# Altium PCB PCB.PcbDoc
Units mil, origin at the board's own origin, x right, y up, seen from the top; angles counter-clockwise.
Board outline 3937.01 x 3937.01 mil, 2 copper layers (Top Layer, Bottom Layer); 30 components, 19 nets, 76 pads, 0 vias.
Unrouted connection lines stored in the file: 14.
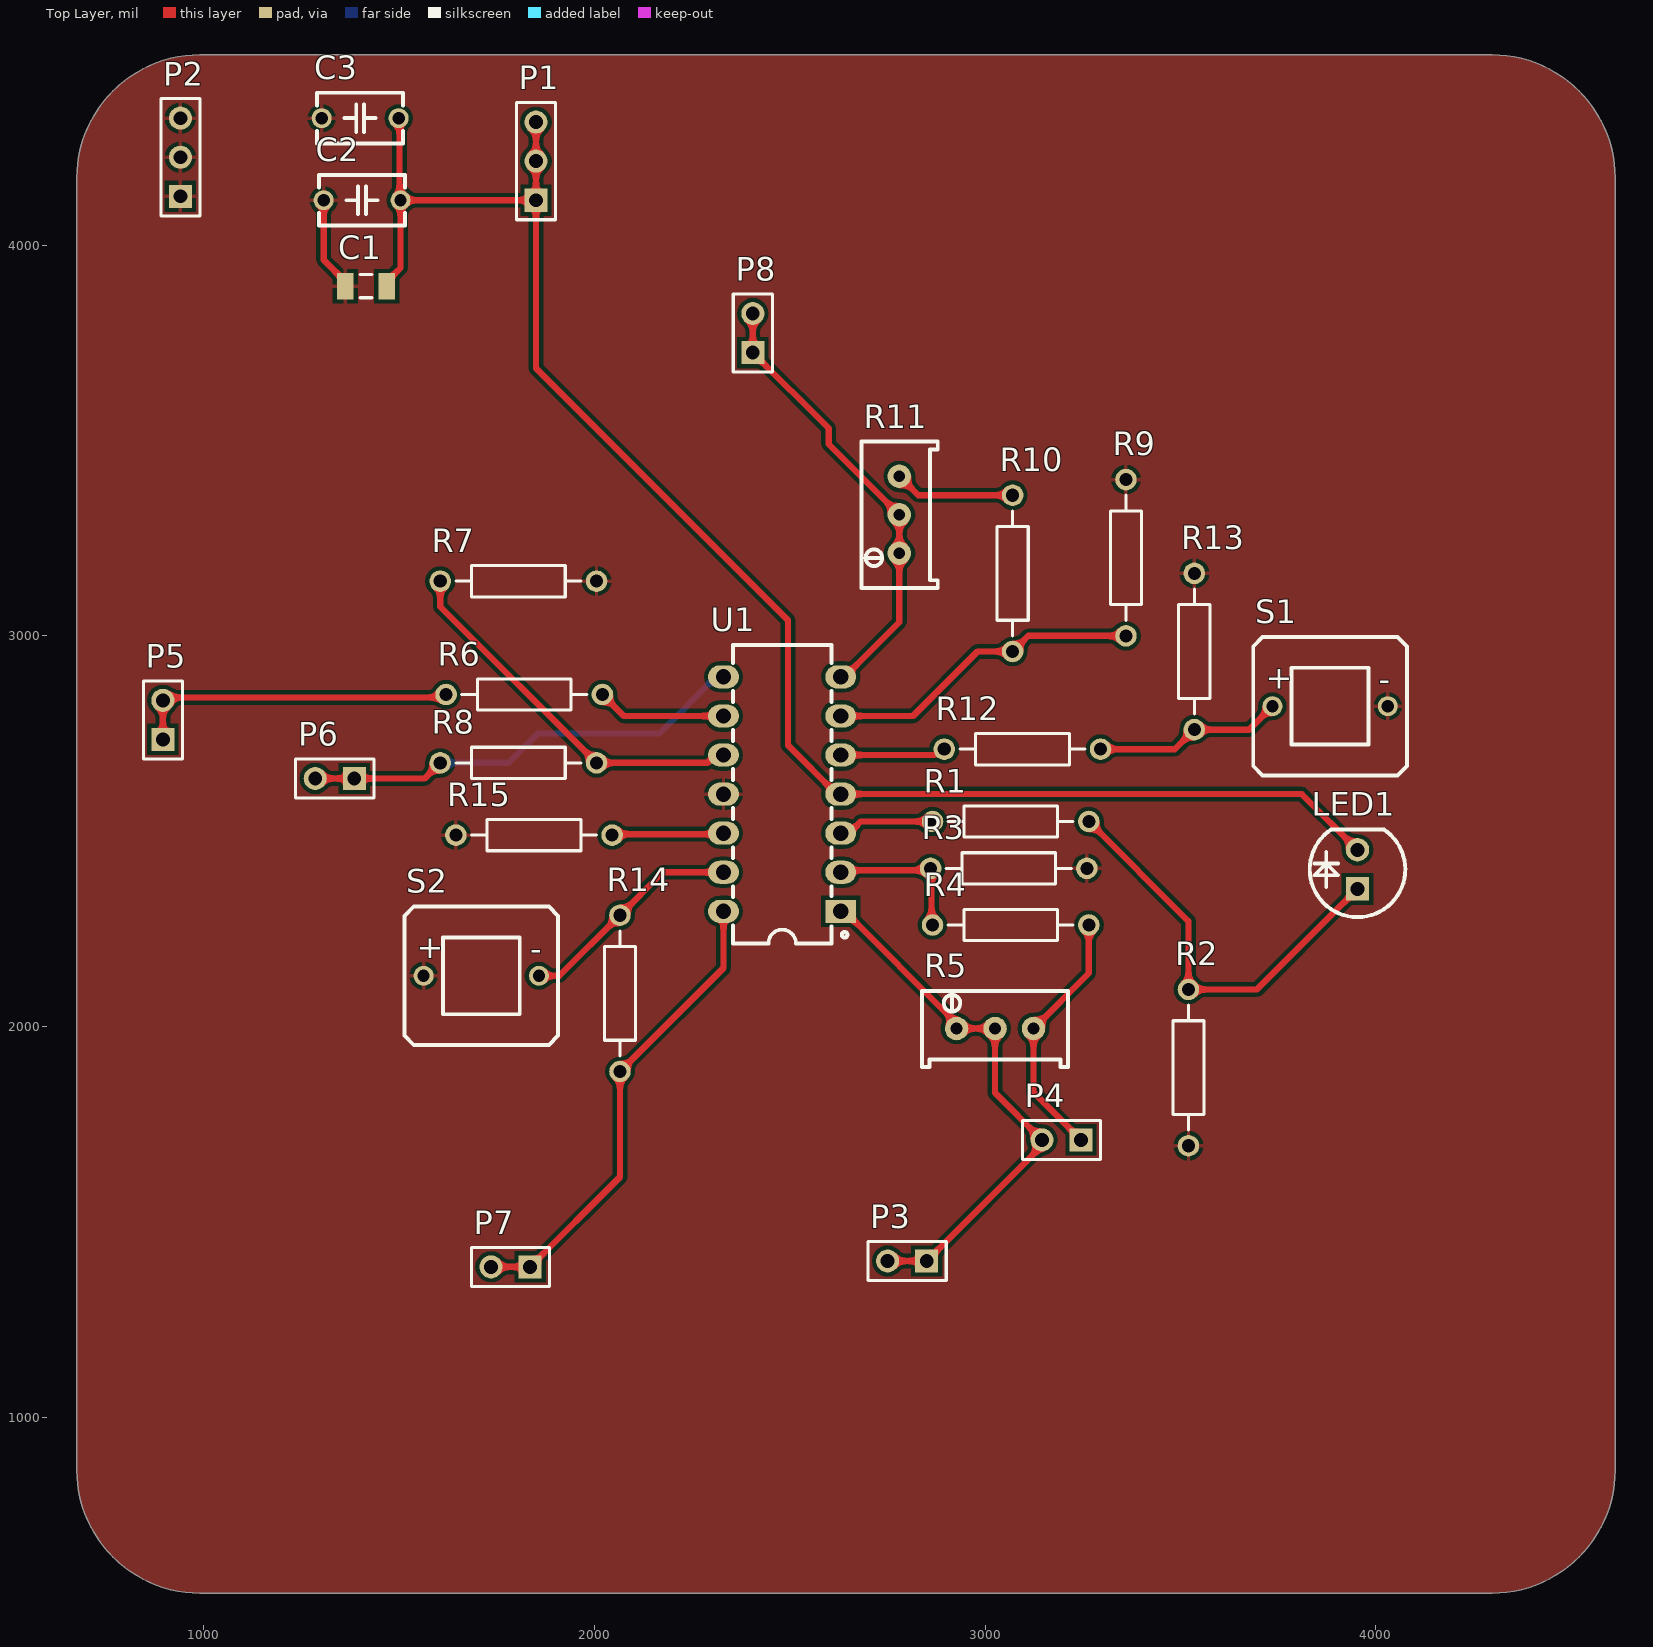
[diagram p0: Top Layer view]
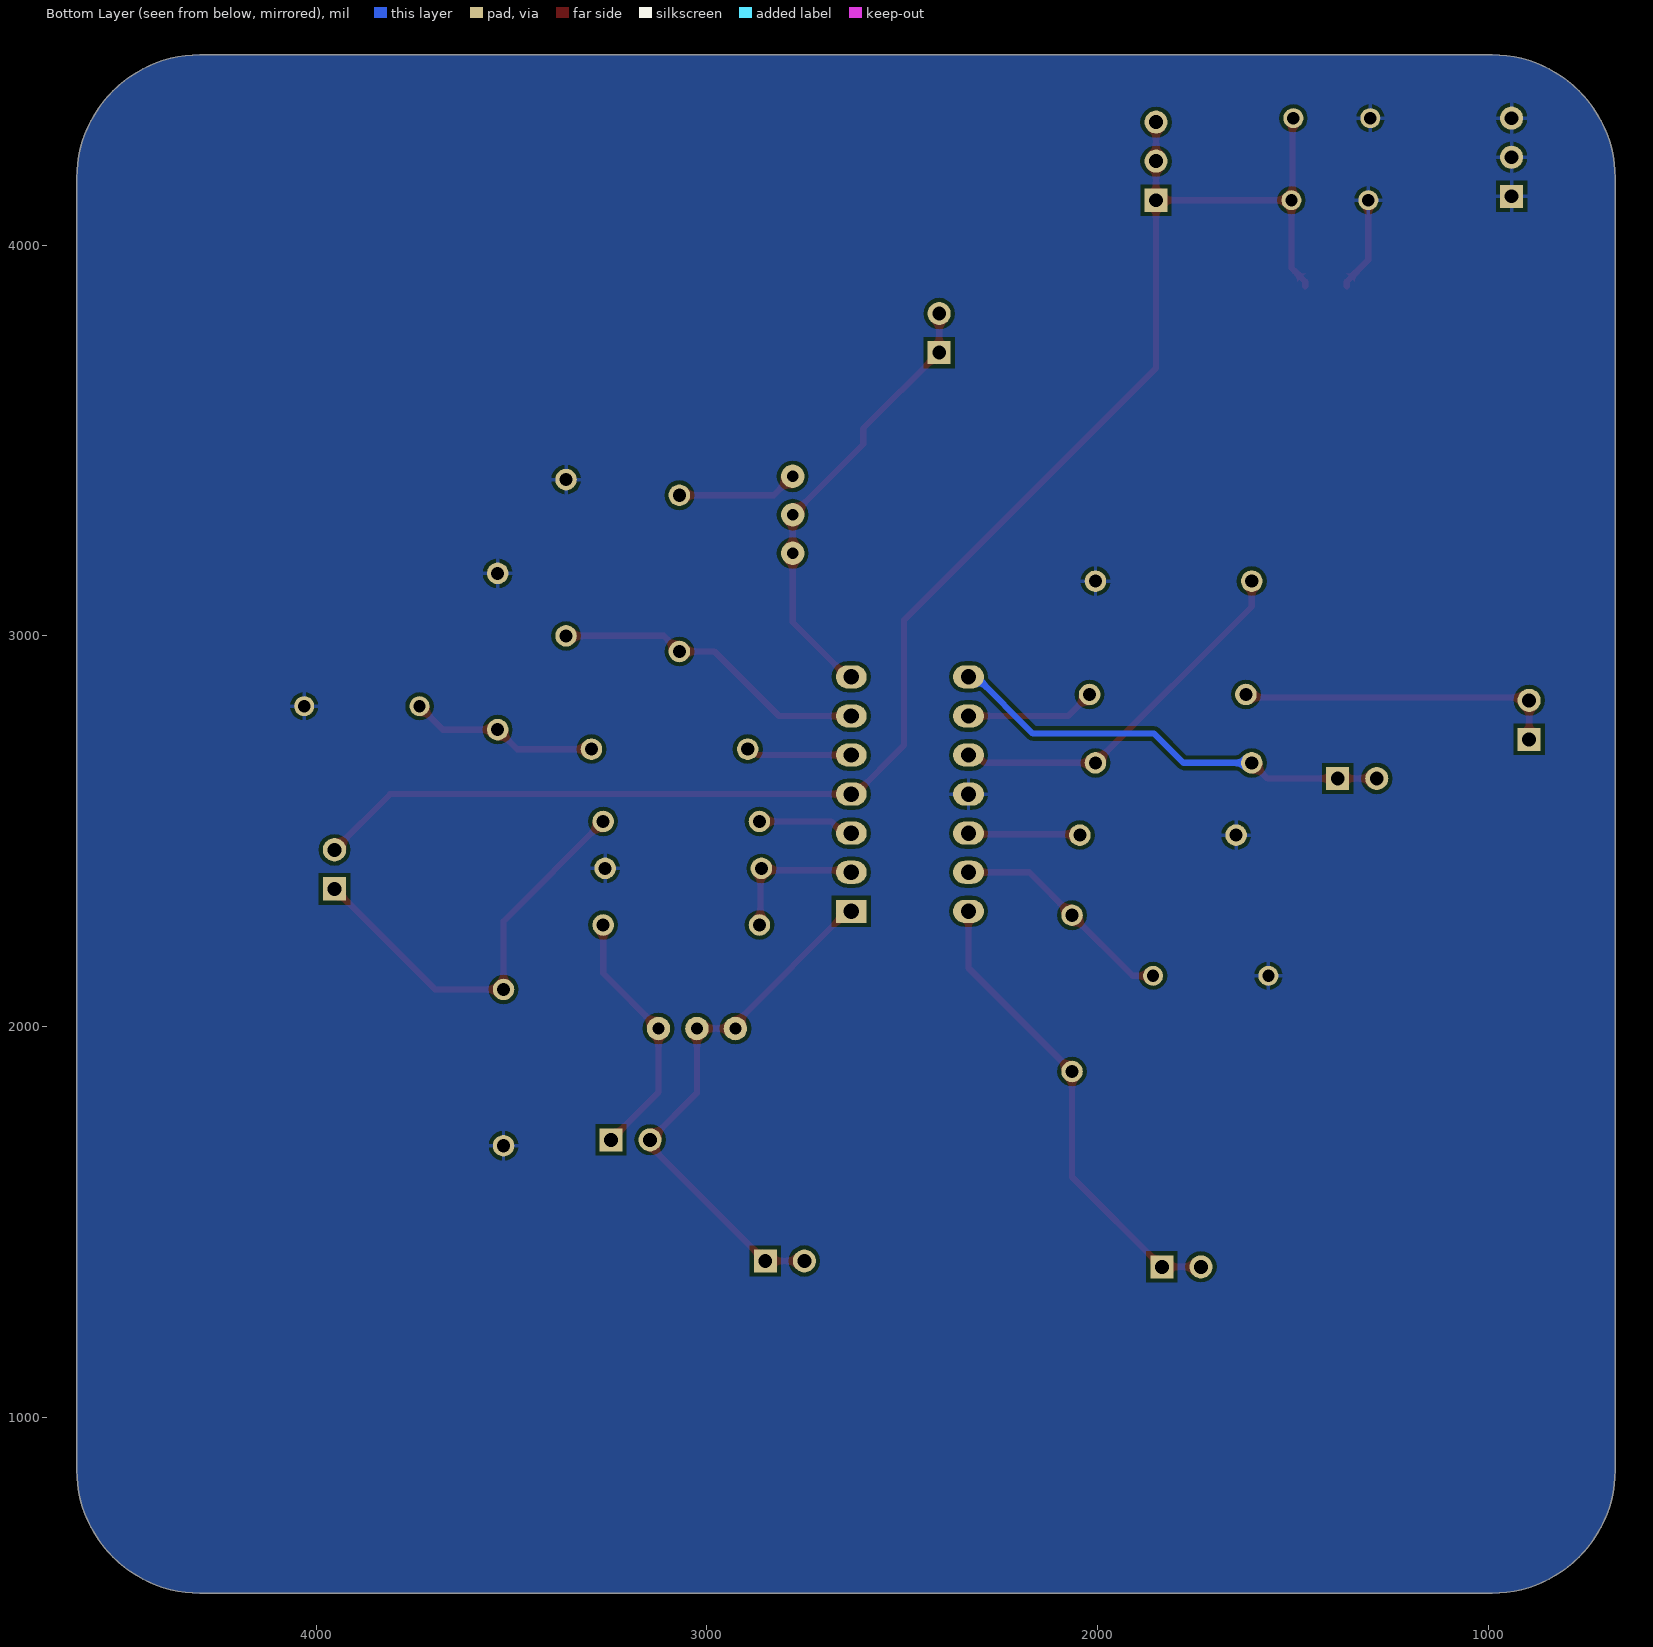
[diagram p1: Bottom Layer view, seen from below]

## Layer stack, top to bottom
Top Solder: solder mask 0.4, Solder Resist, Dk 3.5
Top Layer: signal copper 1.4
Dielectric 1: dielectric 12.6, FR-4, Dk 4.8
Bottom Layer: signal copper 1.4
Bottom Solder: solder mask 0.4, Solder Resist, Dk 3.5

## Board outline
675,864.96 ccw(c989.96,864.96) 989.96,550 4297.05,550 ccw(c4297.05,864.96) 4612.01,864.96 4612.01,4172.05 ccw(c4297.05,4172.05) 4297.05,4487.01 989.96,4487.01 ccw(c989.96,4172.05) 675,4172.05

## Design rules (kind name [scope] priority, off if disabled: settings)
Clearance [All] p1: gap=10 ignorepadtopadclearanceinfootprint=FALSE except(0: Arc-Hole Track-Hole SMDPad-Hole THPad-Hole Via-Hole Fill-Hole Poly-Hole Region-Hole Text-Hole)
PolygonConnect [All] p1: connectstyle=Relief reliefconductorwidth=10 reliefentries=4 polygonreliefangle="90 Angle" airgapwidth=10
RoutingVias [All] p1: holewidth=28 width=50 viastyle="Through Hole" minholewidth=28 minwidth=50 maxholewidth=28 maxwidth=50
SolderMaskExpansion [All] p1: expansion=4
Width [All] p1: maxlimit=32 minlimit=8 preferedwidth=16 minimp=50.000000 maximp=50.000000 favimp=50.000000
30 further rules are at their usual default settings.

## Components (designator, comment, footprint, x,y, rotation, side; value= is the part's Value field where it differs from the comment)
C1 "Cap Semi" C1206 1415,3895 r0 top value=10uF
C2 "Cap Semi" CAP-TH_L5.5-W3.0-P5.00-D0.6 1405,4115 r0 top value=0.1uF
C3 "Cap Semi" CAP-TH_L5.5-W3.0-P5.00-D0.6 1400,4325 r0 top value=0.1uF
LED1 "SFH203PFA" LED-TH_BD5.9-P2.54-FD 3950,2405 r90 top
P1 "5V" HDR1X3 1850,4115 r90 top
P2 "GND" HDR1X3 940,4125 r90 top
P3 "O1T" HDR1X2 2850,1400 r180 top
P4 "TM" HDR1X2 3245,1710 r180 top
P5 "CMIN" HDR1X2 895,2735 r90 top
P6 "CM" HDR1X2 1385,2635 r180 top
P7 "CM" HDR1X2 1835,1385 r180 top
P8 "CM" HDR1X2 2405,3725 r90 top
R1 "Res2" AXIAL-0.4 3065,2525 r0 top value=1K
R2 "Res2" AXIAL-0.4 3520,1895 r90 top value=10K
R3 "Res2" AXIAL-0.4 3060,2405 r180 top value=1K
R4 "Res2" AXIAL-0.4 3065,2260 r0 top value=10K
R5 "RPot" RES-ADJ-TH_3P-L10.0-W10.0-P2.50-L 3025,1995 r0 top value=50K
R6 "Res2" AXIAL-0.4 1820,2850 r0 top value=5.1K
R7 "Res2" AXIAL-0.4 1805,3140 r180 top value=10K
R8 "Res2" AXIAL-0.4 1805,2675 r180 top value=10K
R9 "Res2" AXIAL-0.4 3360,3200 r270 top value=10K
R10 "Res2" AXIAL-0.4 3070,3160 r90 top value=10K
R11 "RPot" RES-ADJ-TH_3P-L10.0-W10.0-P2.50-L 2780,3310 r90 top value=50K
R12 "Res2" AXIAL-0.4 3095,2710 r180 top value=10K
R13 "Res2" AXIAL-0.4 3535,2960 r270 top value=10K
R14 "Res2" AXIAL-0.4 2065,2085 r270 top value=3K
R15 "Res2" AXIAL-0.4 1845,2490 r0 top value=3K
S1 "2DU6" 2DU6PERSONAL 3882.64,2820 r0 top
S2 "2DU6" 2DU6PERSONAL 1710,2130 r0 top
U1 "LM324N" DIP-14_L19.4-W6.4-P2.54-LS7.6-BL 2389.37,1802.4 r90 top

## Footprints (in the part's own frame and the unit in brackets; to place one, negate y for a bottom-side part, rotate by r counter-clockwise, add the part's x,y. Pads: shape width x height; smd on the part's side, far side on the other; paste and mask are expansions set on the pad)
2DU6PERSONAL [mm]
  round 1.3 hole 0.8: 1(-3.75,0) 2(3.75,0)
  silkscreen extent -5,-4.5 5,4.5
AXIAL-0.4 [mm] "Axial Device, Thru-Hole; 2 Leads; 0.4 in Pin Spacing"
  round 1.4 hole 0.85: 1(-5.08,0) 2(5.08,0)
  silkscreen extent -4.06,-1.02 4.06,1.02
C1206 [mm] "Chip Capacitor, Body 3.2x1.6mm, IPC High Density"
  rect 1.1x1.7 smd: 1(-1.35,0) 2(1.35,0)
  silkscreen extent -0.4,-0.75 0.4,0.75, body extent -1.7,-0.9 1.7,0.9, height 1.3
CAP-TH_L5.5-W3.0-P5.00-D0.6 [mm]
  round 1.3 hole 0.8: 1(-2.5,0) 2(2.5,0)
  silkscreen extent -2.79,-1.65 2.79,1.65
DIP-14_L19.4-W6.4-P2.54-LS7.6-BL [mm]
  rect 1.5x2 hole 1: 1(12.512,-6.112)
  oval 1.5x2 hole 1: 2(15.052,-6.112) 3(17.592,-6.112) 4(20.132,-6.112) 5(22.672,-6.112) 6(25.212,-6.112) 7(27.752,-6.112) 8(27.752,1.508) 9(25.212,1.508) 10(22.672,1.508) 11(20.132,1.508) 12(17.592,1.508) 13(15.052,1.508) 14(12.512,1.508)
  silkscreen extent 10.43,-6.55 29.83,0.9
HDR1X2 [mm] "Connector; Header; 2 Position"
  rect 1.5x1.5 hole 0.9: 1(0,0)
  round 1.5 hole 0.9: 2(2.54,0)
  silkscreen extent -1.27,-1.27 3.81,1.27
HDR1X3 [mm] "Connector; Header; 3 Position"
  rect 1.5x1.5 hole 0.9: 1(0,0)
  round 1.5 hole 0.9: 2(2.54,0) 3(5.08,0)
  silkscreen extent -1.27,-1.27 6.35,1.27
LED-TH_BD5.9-P2.54-FD [mil]
  rect 60x60 hole 36: 1(-52.64,-2.67)
  round 60 hole 36: 2(47.36,-2.67)
  silkscreen extent -125,-125 100,120
RES-ADJ-TH_3P-L10.0-W10.0-P2.50-L [mil]
  round 60 hole 30: 1(-98.42,0) 2(98.43,0) 3(0,0)
  silkscreen extent -187,-98 187,96

## Part data
C1 C2 C3: "Capacitor (Semiconductor SIM Model)", LatestRevisionDate=29-May-2009, LatestRevisionNote="IPC-7351 Footprint Added.", PackageDescription="Chip Capacitor", PackageReference=C1206, Published=8-Jun-2000, Publisher="Altium Limited"
LED1: BOM_JLCPCB Part Class="Extended Part", BOM_Manufacturer="OSRAM Opto Semicon", BOM_Manufacturer Part=SFH203PFA, BOM_Supplier=LCSC, BOM_Supplier Part=C554984, Contributor=LCSC, spicePre=L, spiceSymbolName=SFH203PFA
P1 P2: library part "Header 3", "Header, 3-Pin", LatestRevisionDate=17-Jul-2002, LatestRevisionNote="Re-released for DXP Platform.", Publisher="Altium Limited"
P3 P4 P5 P6 P7 P8: library part "Header 2", "Header, 2-Pin", LatestRevisionDate=17-Jul-2002, LatestRevisionNote="Re-released for DXP Platform.", Publisher="Altium Limited"
R1 R2 R3 R4 R6 R7 R8 R9 R10 R12 R13 R14 R15: "Resistor", LatestRevisionDate=17-Jul-2002, LatestRevisionNote="Re-released for DXP Platform.", PackageDescription="Axial Device, Thru-Hole; 2 Leads; 0.4 in Pin Spacing", PackageReference=AXIAL-0.4, Published=8-Jun-2000, Publisher="Altium Limited"
R5 R11: "Potentiometer", LatestRevisionDate=17-Jul-2002, LatestRevisionNote="Re-released for DXP Platform.", PackageDescription="Variable Resistor, Thru-Hole; 3 Leads", PackageReference=VR5, Published=8-Jun-2000, Publisher="Altium Limited", Set Position=0.5, Sim Note="Enter the Resistance value and the set point into parameter fields."
U1: BOM_JLCPCB Part Class="Extended Part", BOM_Manufacturer=HGSEMI, BOM_Manufacturer Part=LM324N, BOM_Supplier=LCSC, BOM_Supplier Part=C725320, spicePre=U, spiceSymbolName=LM324N_C725320, subpart_no=1

## Nets (pads, with @x,y where several pads share a name; then routed paths per layer and width w, separated by ;. In a path a pad name is that pad's centre, name@x,y a point inside that pad or via, vN(x,y) a via of type N, cw(c..) or ccw(c..) an arc to the next point about the centre after c; other vN are vias at no path point)
GND: C1.1 C2.1 C3.1 P2.1 P2.2 P2.3 R2.1 R3.1 R7.1 R9.1 R13.1 R15.1 S1.2 S2.1 U1.11 | length 242.9
  Top Layer w16: C2.1 1306.57,3962.09 1361.85,3906.81 C1.1
NetLED1_1: LED1.1 R1.2 R2.2 | length 1074.9
  Top Layer w16: R1.2 3520,2270 R2.2 3695.31,2095 LED1.1
NetP3_1: P3.1 P3.2 P4.2 R5.1 R5.3 U1.1 | length 1393.9
  Top Layer w16: U1.1 2639.84,2295 2918.16,2016.69 2918.16,2003.42 R5.1 R5.3 3025,1830 P4.2 3136.76,1701.76 3136.76,1686.76 P3.1 P3.2
NetP4_1: P4.1 R4.2 R5.2 | length 659
  Top Layer w16: P4.1 3123.43,1831.58 R5.2 3265,2136.58 R4.2
NetP5_1: P5.1 P5.2 R6.1 | length 831.2
  Top Layer w16: P5.1 P5.2 902.52,2842.52 1612.52,2842.52 R6.1
NetP6_1: P6.1 P6.2 R8.2 U1.8 | length 1152.7
  Top Layer w16: P6.2 P6.1 1565,2635 R8.2
  Bottom Layer w16: R8.2 1780,2675 1855,2750 2165,2750 2310,2895 U1.8
NetP7_1: P7.1 P7.2 R14.2 U1.14 | length 1215
  Top Layer w16: P7.2 P7.1 2065,1615 R14.2 2330,2150 U1.14
NetP8_1: P8.1 P8.2 R11.1 R11.3 U1.7 | length 1153.2
  Top Layer w16: P8.2 P8.1 2599.05,3530.95 2599.05,3490.95 R11.3 R11.1 2780,3035.16 2639.84,2895 U1.7
NetR1_1: R1.1 U1.3 | length 247.4
  Top Layer w16: U1.3 2651.49,2495 2681.49,2525 R1.1
NetR3_2: R3.2 R4.1 U1.2 | length 381.2
  Top Layer w16: U1.2 2635,2400 2855,2400 R3.2 2862.5,2402.5 2862.5,2262.5 R4.1
NetR6_2: R6.2 U1.9 | length 332.8
  Top Layer w16: R6.2 2075,2795 U1.9
NetR7_2: R7.2 R8.1 U1.10 | length 964
  Top Layer w16: R7.2 1605,3075 R8.1 2288.51,2675 2308.51,2695 U1.10
NetR9_2: R9.2 R10.1 U1.6 | length 814.9
  Top Layer w16: U1.6 2815,2795 2980,2960 R10.1 3110,3000 R9.2
NetR10_2: R10.2 R11.2 | length 310.1
  Top Layer w16: R11.2 2828.43,3360 R10.2
NetR12_1: R12.1 R13.2 S1.1 | length 485.6
  Top Layer w16: R12.1 3485,2710 R13.2 3675,2760 S1.1
NetR12_2: R12.2 U1.5 | length 271.2
  Top Layer w16: U1.5 2869.41,2695 2884.41,2710 R12.2
NetR14_1: R14.1 S2.2 U1.13 | length 582.1
  Top Layer w16: S2.2 1910,2130 R14.1 2175,2395 U1.13
NetR15_2: R15.2 U1.12 | length 287.1
  Top Layer w16: R15.2 2047.5,2492.5 2327.5,2492.5 U1.12
VCC_5V: C1.2 C2.2 C3.2 LED1.2 P1.1 P1.2 P1.3 U1.4 | length 4223.9
  Top Layer w16: C1.2 1468.15,3906.81 1503.42,3942.08 C2.2 ; C3.2 1500.92,4322.5 1500.92,4117.5 C2.2 ; P1.3 P1.2 P1.1 ; LED1.2 3810.02,2595 U1.4 2620.16,2595 2495,2720.16 2495,3040 1850,3685 P1.1 ; C2.2 P1.1

## Polygon pours and split planes (outlines as drawn)
GND on Top Layer "Top Layer-No Net" (solid, remove dead copper, pour order 17): 675,864.96 ccw(c989.96,864.96) 989.96,550 4297.05,550 ccw(c4297.05,864.96) 4612.01,864.96 4612.01,4172.05 ccw(c4297.05,4172.05) 4297.05,4487.01 989.96,4487.01 ccw(c989.96,4172.05) 675,4172.05
GND on Bottom Layer "Top Layer-No Net1" (solid, remove dead copper, pour order 18): 675,864.96 ccw(c989.96,864.96) 989.96,550 4297.05,550 ccw(c4297.05,864.96) 4612.01,864.96 4612.01,4172.05 ccw(c4297.05,4172.05) 4297.05,4487.01 989.96,4487.01 ccw(c989.96,4172.05) 675,4172.05

## Silkscreen, mask and mechanical layers (free items; w line width, h text height)
Mechanical 1:
  the board outline again, w10

## Text inside footprints (layer, text, board x,y; h text height)
S1: Top Overlay "+" at 3717.64,2865 h60; Top Overlay "-" at 4007.64,2860 h60
S2: Top Overlay "+" at 1545,2175 h60; Top Overlay "-" at 1835,2170 h60